# Altium PCB ESP12.PcbDoc
Units mm, origin at the board's own origin, x right, y up, seen from the top; angles counter-clockwise.
Board outline 50.31 x 70.27 mm, 2 copper layers (Top Layer, Bottom Layer); 32 components, 27 nets, 150 pads, 17 vias.
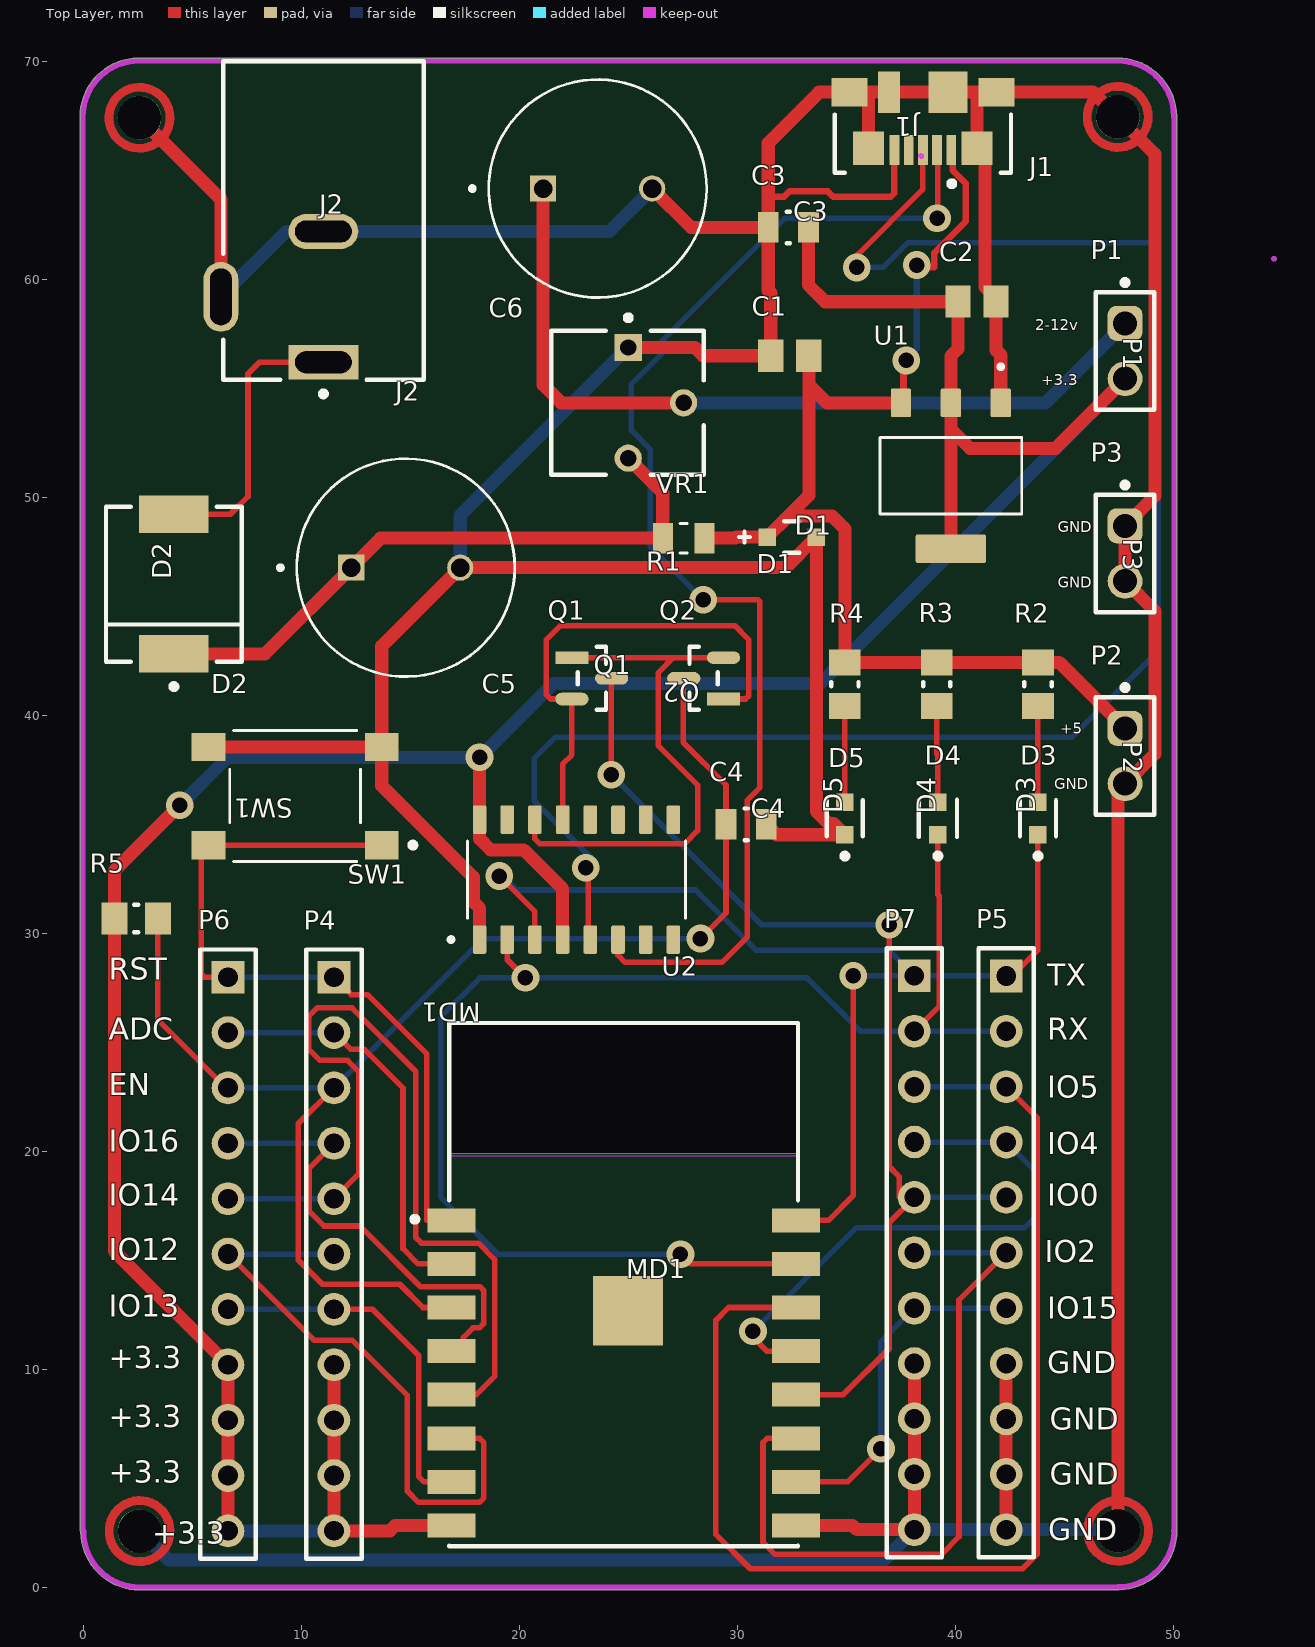
[diagram p0: Top Layer view]
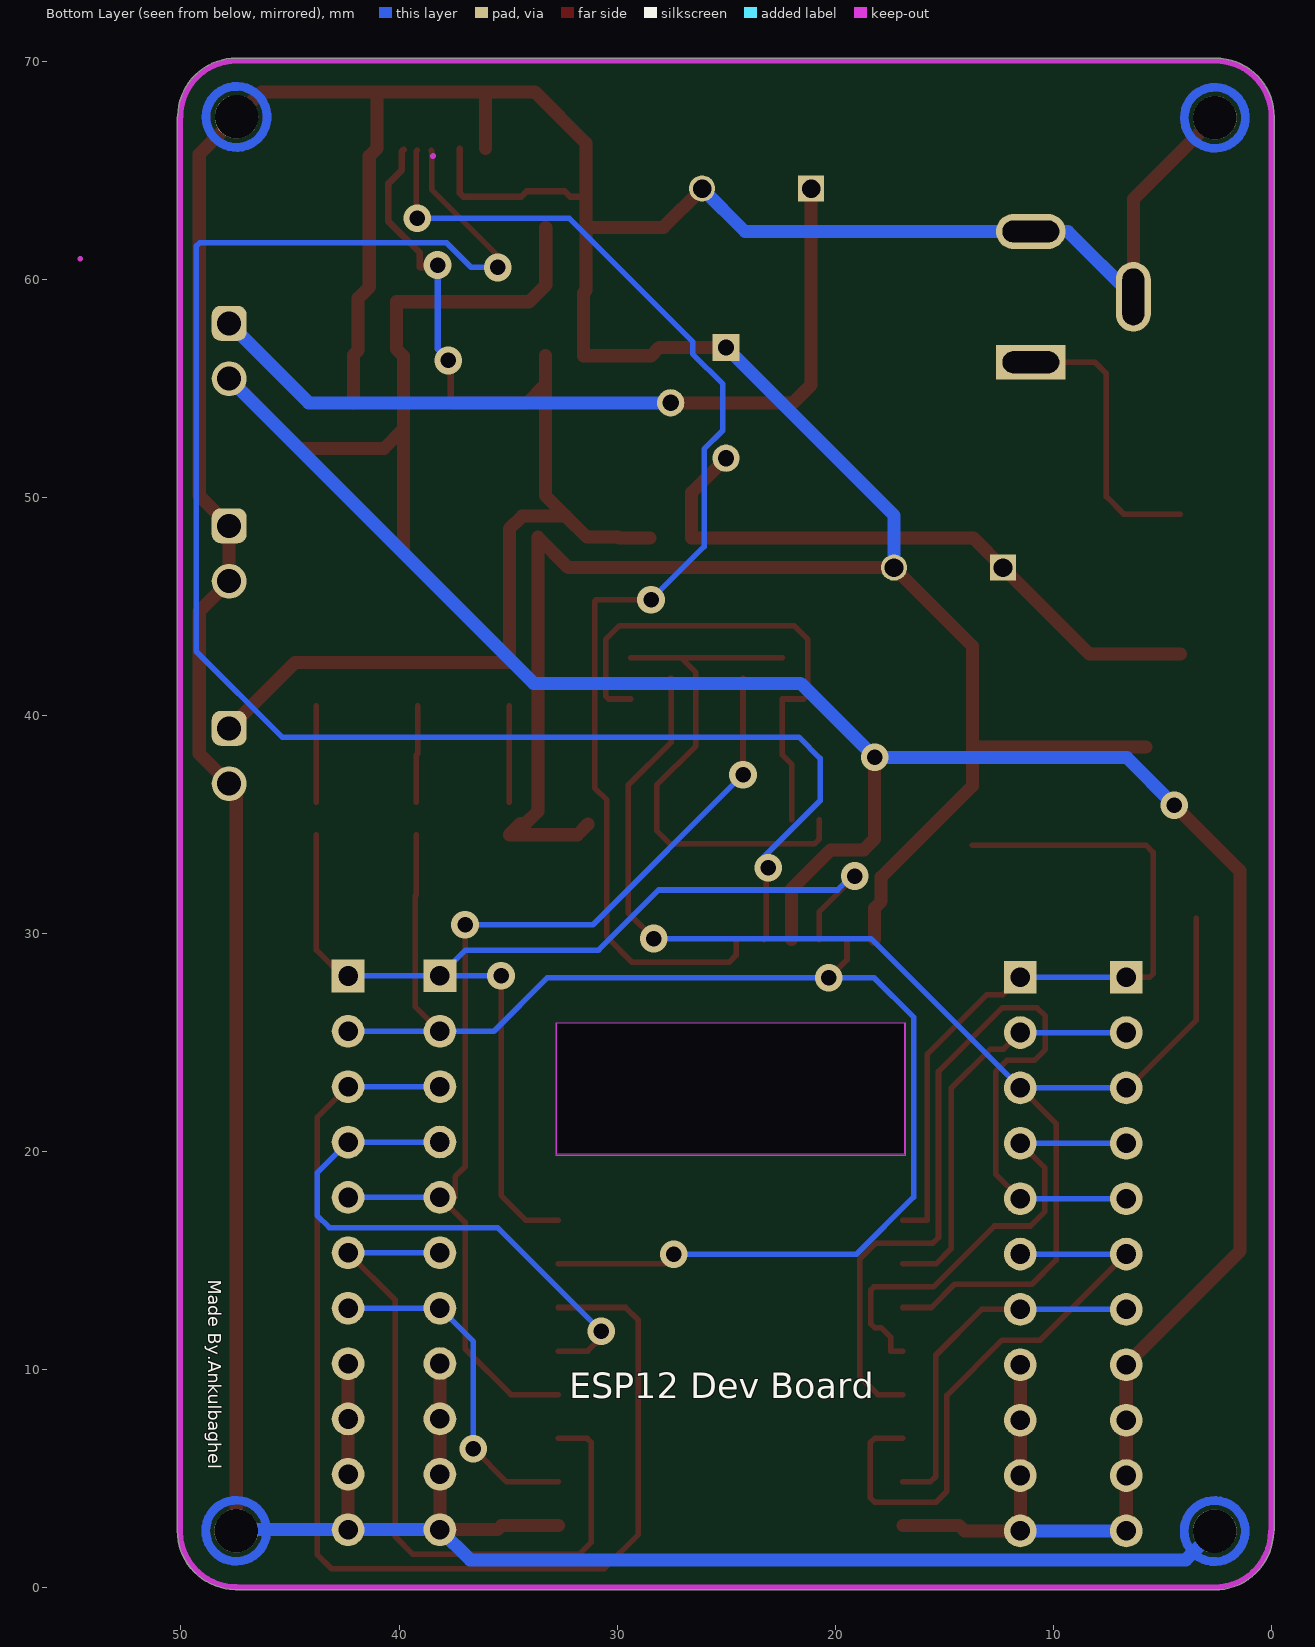
[diagram p1: Bottom Layer view, seen from below]
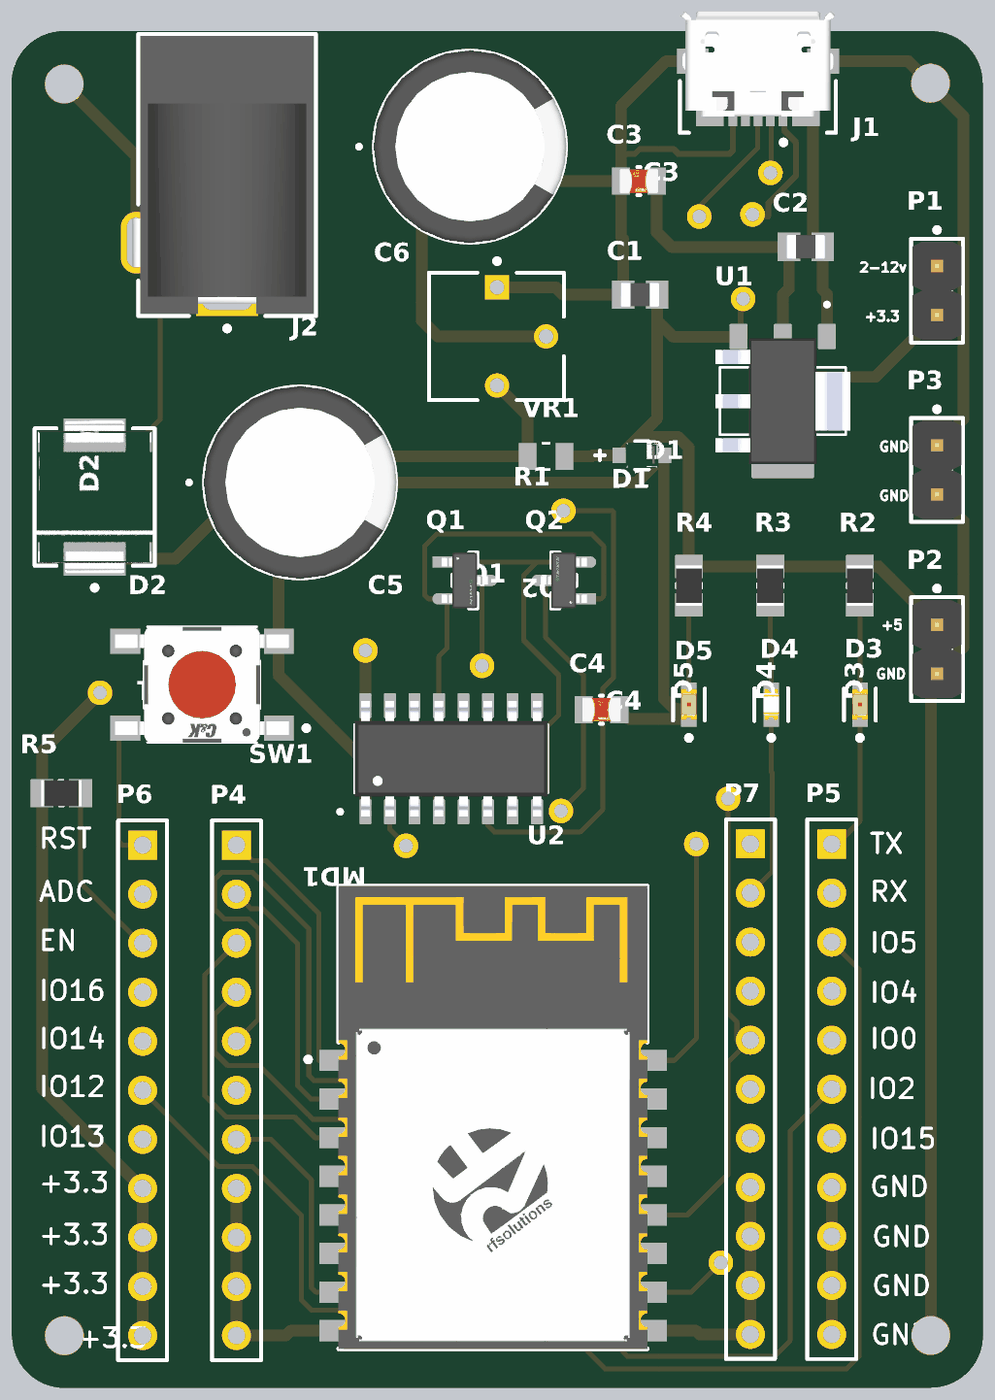
[diagram p2: 3D render of the assembled board from above, using the file's embedded part models]

## Layer stack, top to bottom
Top Solder: solder mask 0.0102, Solder Resist, Dk 3.5
Top Layer: signal copper 0.0356
Dielectric 1: dielectric 0.32, FR-4, Dk 4.8
Bottom Layer: signal copper 0.0356
Bottom Solder: solder mask 0.0102, Solder Resist, Dk 3.5

## Board outline
-0.144,2.603 -0.144,67.437 cw(c2.555,67.437) 2.534,70.136 2.557,70.138 47.452,70.138 cw(c47.452,67.439) 50.15,67.484 50.165,67.425 50.165,2.586 cw(c47.466,2.586) 47.511,-0.113 47.452,-0.127 2.587,-0.127 cw(c2.587,2.572)
cut-out: 16.794,19.872 16.794,25.866 32.778,25.866 32.778,19.872

## Design rules (kind name [scope] priority, off if disabled: settings)
Clearance [All] p1: gap=0.254 ignorepadtopadclearanceinfootprint=FALSE
PolygonConnect [All] p1: connectstyle=Relief reliefconductorwidth=0.254 reliefentries=4 polygonreliefangle="90 Angle" airgapwidth=0.254
RoutingVias [All] p1: holewidth=0.711 width=1.27 viastyle="Through Hole" minholewidth=0.711 minwidth=1.27 maxholewidth=0.711 maxwidth=1.27
SolderMaskExpansion [All] p1: expansion=0 istentingtop=FALSE
SupplyNets "Schematic Supply Nets_4" [InNet('+5')] p1: voltage=0.000
SupplyNets "Schematic Supply Nets_3" [InNet('2-12V')] p2: voltage=0.000
SupplyNets "Schematic Supply Nets_2" [InNet('GND')] p3: voltage=0.000
SupplyNets "Schematic Supply Nets_1" [InNet('+12V')] p4: voltage=0.000
SupplyNets "Schematic Supply Nets" [InNet('+3.3')] p5: voltage=0.000
Width [InNetClass('Power')] p1: maxlimit=0.9 minlimit=0.3 preferedwidth=0.6
30 further rules are at their usual default settings.

## Classes and differential pairs
net class Comm: D+ D- EN IO0 RST RX TX
net class Power: 2-12V +3.3 +5 +12V GND

## Components (designator, comment, footprint, x,y, rotation, side; value= is the part's Value field where it differs from the comment)
C1 "10uF" CAPC2012X145N 32.411,56.484 r0 top
C2 "10uF" CAPC2012X145N 40.997,58.968 r0 top
C3 "100nF" FP-CC0805-0_85-MFG 32.346,62.37 r0 top value="100 nF"
C4 "1uF" FP-CC0805-0_85-MFG 30.409,34.992 r0 top value="1 uF"
C5 "1000uF" CAPPRD500W60D1000H1600 14.796,46.764 r0 top
C6 "1000uF" CAPPRD500W60D1000H1600 23.598,64.152 r0 top
D1 "MM3Z5V6B" FP-MM3Z5V6B-MFG 32.508,48.168 r0 top
D2 "SS34-E3/57T" FP-95402-MFG 4.158,46.008 r90 top
D3 "LTST-C190KRKT" FP-LTST-C190KRKT-MFG 43.794,35.262 r90 top
D4 "LTST-C190KGKT" FP-LTST-C190KGKT-MFG 39.204,35.262 r90 top
D5 "LTST-C190KRKT" FP-LTST-C190KRKT-MFG 34.938,35.262 r90 top
J1 "473460001" FP-473460001-MFG 38.513,68.225 r180 top
J2 "PJ-102A" FP-PJ-102A-MFG 11.018,62.684 r0 top
MD1 "ESP-12S" FP-ESP-12S-MFG 24.786,13.878 r0 top
P1 "61300211121" 61300211121 47.79,56.7 r270 top
P2 "61300211121" 61300211121 47.79,38.124 r270 top
P3 "61300211121" 61300211121 47.79,47.412 r270 top
P4 "Header 11" HDR1X11 11.502,27.98 r270 top
P5 "Header 11" HDR1X11 42.336,28.036 r270 top
P6 "Header 11" HDR1X11 6.642,27.98 r270 top
P7 "Header 11" HDR1X11 38.124,28.038 r270 top
Q1 "BSS138" FP-318-08-IPC_B 23.328,41.688 r0 top
Q2 "BSS138" FP-318-08-IPC_B 28.458,41.688 r180 top
R1 "10k" RESC2012X60N 27.54,48.114 r0 top
R2 "1K" RESC2013X60X35ML10T20 43.794,41.418 r270 top
R3 "1K" RESC2013X60X35ML10T20 39.15,41.418 r270 top
R4 "1K" RESC2013X60X35ML10T20 34.938,41.418 r270 top
R5 "1K" RESC2013X60X35ML10T20 2.43,30.672 r0 top
SW1 "PTS645SM43SMTR92LFS" PTS645SM43SMTR92LFS_MFG 9.72,36.288 r180 top
U1 "AMS1117-3.3" SOT229P700X180-4N 39.798,50.976 r270 top
U2 "CH340C" SOIC127P600X180-16N 22.626,32.454 r90 top
VR1 "3362P-1-103LF" BOUR-3362P 24.965,54.324 r270 top

## Footprints (in the part's own frame and the unit in brackets; to place one, negate y for a bottom-side part, rotate by r counter-clockwise, add the part's x,y. Pads: shape width x height; smd on the part's side, far side on the other; paste and mask are expansions set on the pad)
61300211121 [mm] "Pin Header, pitch 2.54 mm, THT, Vertical, single row, 2p"
  rrect50% 1.6x1.6 hole 1.1: 1(-1.27,0)
  round 1.6 hole 1.1: 2(1.27,0)
  silkscreen extent -3.26,-1.35 2.69,1.34, body extent -2.54,-1.27 2.54,1.27, height 8.57
BOUR-3362P [mm] "THD, 3-Leads, Body 6.6x6.99mm, Pitch 2.54mm"
  rect 1.25x1.25 hole 0.75: 1(-2.54,0.035)
  round 1.25 hole 0.75: 2(0,2.575) 3(2.54,0.035)
  silkscreen extent -4.02,-3.49 3.3,3.5, body extent -3.3,-3.49 3.3,3.49, height 4.95
CAPC2012X145N [mm]
  rect 1.16x1.47 smd: 1(-0.875,0) 2(0.875,0)
  body extent -1,-0.63 1,0.63, height 0.7
CAPPRD500W60D1000H1600 [mm]
  round 1.2 hole 0.85: N(2.5,0)
  rect 1.2x1.2 hole 0.85: P(-2.5,0)
  silkscreen extent -5.85,-5 5,5, body extent -5,-5 5,5, height 16
FP-318-08-IPC_B [mm]
  rect 1.524x0.578 smd paste+0 mask+0: 1(-0.91,0.95)
  rrect100% 1.524x0.578 smd paste+0 mask+0: 2(-0.91,-0.95) 3(0.91,0)
  silkscreen extent -0.65,-1.45 0.65,1.45, body extent -1.92,-1.7 1.92,1.7, height 0.25
FP-95402-MFG [mm]
  rect 1.72x3.2 smd paste+0 mask+0: 1(-3.205,0) 2(3.205,0)
  silkscreen extent -4.82,-3.11 3.55,3.11, body extent -4.17,-3.21 4.17,3.21, height 0.25
FP-473460001-MFG [mm]
  rect 0.45x1.38 smd paste+0 mask+0: 1(-1.3,2.31) 2(-0.65,2.31) 3(0,2.31) 4(0.65,2.31) 5(1.3,2.31)
  rect 1.425x1.55 smd paste+0 mask+0: 6(-2.488,2.225) 7(2.487,2.225)
  rect 1.65x1.3 smd paste+0 mask+0: 8(-3.375,-0.35) 11(3.375,-0.35)
  rect 1.8x1.9 smd paste+0 mask+0: 9(-1.15,-0.35)
  rect 1x1.9 smd paste+0 mask+0: 10(1.55,-0.35)
  silkscreen extent -4.04,0.68 4.05,3.97, body extent -4.3,-2.48 4.3,3.45, height 0.25
FP-CC0805-0_85-MFG [mm]
  rect 0.95x1.4 smd paste+0 mask+0: 1(-0.925,0) 2(0.925,0)
  silkscreen extent -0.07,-0.72 0.07,0.72, body extent -1.6,-1.05 1.6,1.05, height 0.25
FP-ESP-12S-MFG [mm]
  rect 2.2x1.1 smd paste+0 mask+0: 1(-7.9,2.95) 2(-7.9,0.95) 3(-7.9,-1.05) 4(-7.9,-3.05) 5(-7.9,-5.05) 6(-7.9,-7.05) 7(-7.9,-9.05) 8(-7.9,-11.05) 9(7.9,-11.05) 10(7.9,-9.05) 11(7.9,-7.05) 12(7.9,-5.05) 13(7.9,-3.05) 14(7.9,-1.05) 15(7.9,0.95) 16(7.9,2.95)
  rect 3.2x3.2 smd paste+0 mask+0: 17(0.2,-1.2)
  Keep-Out Layer region: -8,5.9 8,5.9 8,12 -8,12
  Keep-Out Layer region: -8,5.9 8,5.9 8,12 -8,12
  silkscreen extent -9.7,-12 8,12, body extent -9.1,-12.1 9.1,12.1, height 0.25
FP-LTST-C190KGKT-MFG [mm]
  rect 0.8x0.8 smd paste+0 mask+0: 1(-0.75,0) 2(0.75,0)
  silkscreen extent -1.85,-0.87 0.85,0.87, body extent -1.25,-0.55 1.25,0.55, height 0.25
FP-LTST-C190KRKT-MFG [mm]
  rect 0.8x0.8 smd paste+0 mask+0: 1(-0.75,0) 2(0.75,0)
  silkscreen extent -1.85,-0.82 0.83,0.83, body extent -1.25,-0.55 1.25,0.55, height 0.25
FP-MM3Z5V6B-MFG [mm]
  rect 0.8x0.8 smd paste+0 mask+0: 1(-1.125,0) 2(1.125,0)
  silkscreen extent -2.42,-0.73 0.35,0.72, body extent -1.63,-0.82 1.63,0.82, height 0.25
FP-PJ-102A-MFG [mm]
  rect 3.2x1.6 hole 1 slot 2.6 at 0 deg paste-2539.97 mask+0: 1(0,-6.5)
  rrect100% 3.2x1.6 hole 1 slot 2.6 at 0 deg paste-2539.97 mask+0: 2(0,-0.5)
  rrect100% 1.6x3.2 hole 2.6 slot 1 at 0 deg paste-2539.97 mask+0: 3(-4.7,-3.5)
  silkscreen extent -4.6,-8.07 4.6,7.3, body extent -5.6,-7.4 4.7,7.4, height 0.25
HDR1X11 [mm] "Connector; Header; 11 Position"
  rect 1.5x1.5 hole 0.9: 1(0,0)
  round 1.5 hole 0.9: 2(2.54,0) 3(5.08,0) 4(7.62,0) 5(10.16,0) 6(12.7,0) 7(15.24,0) 8(17.78,0) 9(20.32,0) 10(22.86,0) 11(25.4,0)
  silkscreen extent -1.27,-1.27 26.67,1.27
PTS645SM43SMTR92LFS_MFG [mm] "Recommended Land Pattern"
  rect 1.55x1.3 smd paste+0 mask+0: 1(-3.975,2.25) 2(3.975,2.25) 3(-3.975,-2.25) 4(3.975,-2.25)
  silkscreen extent -5.53,-3 3,3, body extent -4.5,-3 4.5,3, height 5.3
RESC2012X60N [mm]
  rect 0.92x1.38 smd: 1(-0.955,0) 2(0.955,0)
  silkscreen extent -0.17,-0.68 0.17,0.68
RESC2013X60X35ML10T20 [mm] "Chip Resistor, 2-Leads, Body 2.1x1.35mm, IPC Low Density"
  rect 1.2x1.45 smd: 1(-1,0) 2(1,0)
  silkscreen extent -0.1,-0.63 0.1,0.62, body extent -1.05,-0.68 1.05,0.67, height 0.6
SOIC127P600X180-16N [mm]
  rrect25% 1.31x0.62 smd: 1(-2.75,4.445) 2(-2.75,3.175) 3(-2.75,1.905) 4(-2.75,0.635) 5(-2.75,-0.635) 6(-2.75,-1.905) 7(-2.75,-3.175) 8(-2.75,-4.445) 9(2.75,-4.445) 10(2.75,-3.175) 11(2.75,-1.905) 12(2.75,-0.635) 13(2.75,0.635) 14(2.75,1.905) 15(2.75,3.175) 16(2.75,4.445)
  silkscreen extent -2.85,-5 1.78,5.85, body extent -3,-5 3,5, height 1.8
SOT229P700X180-4N [mm]
  rrect15% 1.31x0.93 smd: 1(-3.345,2.29) 2(-3.345,0) 3(-3.345,-2.29)
  rrect15% 1.31x3.24 smd: 4(3.345,0)
  silkscreen extent -5.1,-3.25 1.75,3.25, body extent -3.25,-3.5 3.25,3.5, height 1.8

## Part data
C1 C2: library part CC0805KKX5R8BB106, "10 ÂµF Â±10% 25V Ceramic Capacitor X5R 0805 (2012 Metric)", Package="0805 Yageo", Check_prices=https://www.snapeda.com/parts/CC0805KKX5R8BB106/Yageo/view-part/?ref=eda, MF=Yageo, MP=CC0805KKX5R8BB106, SnapEDA_Link=https://www.snapeda.com/parts/CC0805KKX5R8BB106/Yageo/view-part/?ref=snap
C3: library part CMP-2100-03606-3, "CAP CER 0.1UF 50V X7R 0805", Capacitance="100 nF", Manufacturer=Yageo, Manufacturer Part Number=CC0805KRX7R9BB104, Package=CC0805-0.85, Temperature="-30°C to +85°C", Temperature Characteristic=X7R, Temperature Range High=+85°C, Temperature Range Low=-30°C, Tolerance=0.1, Voltage Rating="50 V", Automotive=No, Category=Cap, ComponentLink2Description=Datasheet, ComponentLink2URL=http://www.yageo.com/documents/recent/UPY-GPHC_Y5V_6.3V-to-50V_8.pdf, Device Class L1="Passive Components", Device Class L2=Capacitors, Device Class L3="Ceramic Capacitors", Digikey Description="CAP CER 0.1UF 50V X7R 0805", Footprint Url=http://www.yageo.com/exep/pages/download/literatures/UPY-C_GEN_24.pdf, Height=0.95mm, Ipc Land Pattern Name=CAPC200125X85, Lead Free=Yes, Material=Ceramic, Mouser Description="Multilayer Ceramic Capacitors MLCC - SMD/SMT 100nF 50V X7R 10%", Octopart=https://octopart.com/cc0805krx7r9bb104-yageo-192993, RoHS=TRUE
C4: library part CMP-03422-000001-1, "CAP CER 1UF 16V X7R 0805", Capacitance="1 uF", Manufacturer=Yageo, Manufacturer Part Number=CC0805KKX7R7BB105, Package=CC0805-0.85, Temperature="-30°C to +85°C", Temperature Characteristic=X7R, Temperature Range High=+85°C, Temperature Range Low=-30°C, Tolerance=0.1, Voltage Rating="16 V", Automotive=No, Category=Cap, ComponentLink2Description=Datasheet, ComponentLink2URL=http://www.yageo.com/documents/recent/UPY-GPHC_Y5V_6.3V-to-50V_8.pdf, Device Class L1="Passive Components", Device Class L2=Capacitors, Device Class L3="Ceramic Capacitors", Digikey Description="CAP CER 1UF 16V X7R 0805", Footprint Url=http://www.yageo.com/exep/pages/download/literatures/UPY-C_GEN_24.pdf, Height=0.95mm, Ipc Land Pattern Name=CAPC200125X85, Lead Free=Yes, Material=Ceramic, Mouser Description="Multilayer Ceramic Capacitors MLCC - SMD/SMT 1.0uF 16V X7R 10%", Octopart=https://octopart.com/cc0805kkx7r7bb105-yageo-8376555, RoHS=TRUE
C5 C6: library part EEUFR1C102B, "CAP ALUM 1000UF 20% 16V RADIAL", Package="RADIAL-2 Panasonic", Availability="In Stock", Check_prices=https://www.snapeda.com/parts/EEU-FR1C102B/Panasonic/view-part/2318035/?ref=eda, MF=Panasonic, MP=EEU-FR1C102B, Price=None, Purchase-URL=https://pricing.snapeda.com/search/part/EEU-FR1C102B/?ref=eda, SnapEDA_Link=https://www.snapeda.com/parts/EEU-FR1C102B/Panasonic/view-part/2318035/?ref=snap
D1: library part CMP-07164-000010-1, "DIODE ZENER 5.6V 200MW SOD323F", Forward Current=10mA, Manufacturer="ON Semiconductor", Max Junction Temp=+150°C, Max Reverse Leakage Current=0.9uA, Max Zener Voltage=5.71V, Nom Zener Voltage=5.6V, Package=SOD323F, Power Dissipation=200mW, Reverse Voltage=2V, Temperature="to +150°C", Automotive=No, Category=Diode, ComponentLink2Description=Datasheet, ComponentLink2URL=https://www.onsemi.com/pub/Collateral/MM3Z9V1B-D.pdf, Device Class L1="Discrete Semiconductors", Device Class L2=Diodes, Device Class L3="Zener Diodes", Digikey Description="DIODE ZENER 5.6V 200MW SOD323F", Height=1mm, Lead Free=Yes, Manufacturer Part Number=MM3Z5V6B, Mouser Description="Zener Diodes Diode Zener 5.6V 200mW 2%", Octopart=https://octopart.com/mm3z5v6b-on+semiconductor-84329898, RoHS=TRUE, Temperature Range High=+150°C, Zener Impedance=37Ω
D2: library part CMP-02539-000012-1, "DIODE SCHOTTKY 40V 3A DO214AB", Forward Current=3A, Manufacturer=Vishay, Max Junction Temp=+150°C, Max Repetitive Reverse Voltage=40V, Max Surge Forward Current=100A, Package=95402, Peak Reverse Current=0.5mA, Temperature="-55°C to +150°C", Temperature Range Low=-55°C, Automotive=No, Category=Diode, ComponentLink2Description=Datasheet, ComponentLink2URL=http://www.vishay.com/docs/88751/ss32.pdf, Device Class L1="Discrete Semiconductors", Device Class L2=Diodes, Device Class L3="Schottky Diodes", Digikey Description="DIODE SCHOTTKY 40V 3A DO214AB", Footprint Url=http://www.vishay.com/docs/95402/smc.pdf, Height=2.62mm, Lead Free=Yes, Manufacturer Part Number=SS34-E3/57T, Mouser Description="Schottky Diodes & Rectifiers 3.0 Amp 40 Volt", Octopart=https://octopart.com/ss34-e3%2F57t-vishay-39552907, RoHS=TRUE, Standoff Height=0mm, Temperature Range High=+150°C
D3 D5: library part CMP-1674-00011-2, "LED RED CLEAR CHIP SMD", Case Code (Imperial)=0603, Case Code (Metric)=1608, Color=Red, Forward Current=30mA, Forward Voltage=2.4V, Lens Color=Colorless, Max Operating Temperature=85°C, Min Operating Temperature=-55°C, Package Quantity=1, Power Dissipation=75mW, Reverse Voltage=5V, Test Current=20mA, Case/Package=0603, Depth=0.8mm, Dominant Wavelength=631nm, Height=0.8mm, Illumination Color=Red, Lead Free="Lead Free", Length=1.6mm, Lens Style=Diffused, Lens Transparency=Clear, Luminous Intensity=54mcd, Mount="Surface Mount", Number of Elements=1, Number of LEDs=1, Number of Pins=2, Packaging="Tape and Reel", Power Rating=75mW, Radiation Hardening=No, Viewing Angle=130°, Wavelength=639nm, Width=0.8mm
D4: library part CMP-2000-05197-2, "LED GREEN CLEAR CHIP SMD", Case Code (Imperial)=0603, Case Code (Metric)=1608, Color=Green, Forward Current=30mA, Forward Voltage=2V, Lens Color=Colorless, Max Operating Temperature=85°C, Min Operating Temperature=-55°C, Package Quantity=1, Power Dissipation=75mW, Reverse Voltage=5V, Test Current=20mA, Case/Package=0603, Depth=0.8mm, Dominant Wavelength=571nm, Height=0.8mm, Illumination Color=Green, Lead Free="Lead Free", Length=1.6mm, Lens Style=Diffused, Lens Transparency=Clear, Luminous Intensity=35mcd, Mount="Surface Mount", Number of Elements=1, Number of LEDs=1, Number of Pins=2, Packaging="Tape and Reel", Power Rating=75mW, Radiation Hardening=No, Viewing Angle=130°, Wavelength=574nm, Width=0.8mm
J1: library part CMP-2000-05246-2, "CONN RCPT USB2.0 MICRO B SMD R/A", Current Rating=1.8A, Manufacturer=Molex, Package=0, Temperature="-30°C to +85°C", Temperature Range High=+85°C, Temperature Range Low=-30°C, Voltage Rating=30V, Automotive=No, Category=Conn, ComponentLink2Description=Datasheet, ComponentLink2URL=https://www.molex.com/webdocs/datasheets/pdf/en-us/0473460001_IO_CONNECTORS.pdf, Conn Orientation="Right Angle", Contact Material=Gold,Nickel, Device Class L1=Connectors, Device Class L2="USB Connectors", Device Class L3=unset, Digikey Description="CONN RCPT USB2.0 MICRO B SMD R/A", Footprint Url=https://www.molex.com/pdm_docs/sd/473460001_sd.pdf, Height=2.945mm, Is Female=yes, Lead Free=Yes, Manufacturer Part Number=473460001, Number Of Contacts=5, Octopart=https://octopart.com/47346-0001-molex-7164928, Pitch=0.65mm, RoHS=TRUE, Shielding=true, Usb Standard="USB 2.0"
J2: library part CMP-12637-106234071-1, "PJ-102A 2.0 x 6.5 mm, 2.5 A, Horizontal, Through Hole, Tapered Pins, Dc Power Jack Connector", Color=Black, Current Rating=2.5A, Flammability Rating="UL94 V-0", Insulation Resistance=50MΩ, Max Operating Temperature=85°C, Min Operating Temperature=-25°C, Voltage Rating=24V, Contact Gender=Male, Contact Material="Copper, Nickel, Tin", Contact Plating=Nickel, Diameter=2.1mm, Gender=Male, Height=11.2mm, Housing Color=Black, Housing Material=Thermoplastic, Inside Diameter=2mm, Lead Free="Lead Free", Lifecycle Status=Production, Mount="Through Hole", NexarPartId=106234071, Number of Conductors=2, Number Of Contacts=3, Orientation=Horizontal, Outside Diameter=6.5mm, Packaging=Bulk, RoHS=Compliant, Schedule B="8536695050, 8536695050", Shielding=No, Termination="Through Hole", Voltage Rating (DC)=24V
MD1: library part CMP-204316-000002-1, "RX TXRX MOD WIFI PCB TRACE SMD", Frequency=2.484GHz, Data Rate=54Mbps, Interface=I2C, Sensitivity=-90dBm, Series=-
P1 P2 P3: library part CMP-1712-00002-7, "THT Vertical Pin Header WR-PHD, Pitch 2.54 mm, Single Row, 2 pins", Color=Black, Contact Resistance=20mΩ, Current Rating=3A, Max Operating Temperature=105°C, Min Operating Temperature=-40°C, Operating Supply Voltage=250V, Connector Type="Male Pin", Contact Gender=Male, Contact Material=Gold, Contact Mating Length=5.9944mm, Contact Plating=Gold, Gender=Male, Height=8.94mm, Housing Material=PBT, Lead Free="Lead Free", Lead Pitch=2.54mm, Mount="Through Hole", Number Of Contacts=2, Number of Pins=2, Number of Positions=2, Number of Rows=1, Orientation=Vertical, Packaging=Bulk, Pitch=2.54mm, REACH SVHC=No, RoHS=Compliant, Termination="Through Hole", Voltage Rating=250V
P4 P5 P6 P7: "Header, 11-Pin", LatestRevisionDate=17-Jul-2002, LatestRevisionNote="Re-released for DXP Platform.", Publisher="Altium Limited"
Q1 Q2: library part CMP-07173-000101-1, "MOSFET N-CH 50V 220MA SOT-23", Case/Package=SOT-23, Continuous Drain Current (ID)=220mA, Drain to Source Breakdown Voltage=50V, Drain to Source Resistance=3.5R, Gate to Source Voltage (Vgs)=20V, Input Capacitance=27pF, Max Operating Temperature=150°C, Max Power Dissipation=360mW, Min Operating Temperature=-55°C, On-State Resistance=6R, Package Quantity=1, Threshold Voltage=1.3V, Contact Plating=Tin, Current Rating=220mA, Drain to Source Voltage (Vdss)=50V, Dual Supply Voltage=50V, Element Configuration=Single, Fall Time=9ns, Height=0.93mm, Lead Free="Lead Free", Length=2.92mm, Mount="Surface Mount", Nominal Vgs=1.3V, Number of Elements=1, Number of Pins=3, Packaging="Tape and Reel", Power Dissipation=360mW, Radiation Hardening=No, Rds On Max=3.5R, REACH SVHC="No SVHC", Rise Time=9ns, Termination=SMD/SMT, Turn-Off Delay Time=20ns, Turn-On Delay Time=2.5ns, Voltage Rating (DC)=50V, Weight=0.03g, Width=1.3mm
R1: library part RC0805JR-0710KL, "RESISTOR THICK FILM 5% 0.125W", Package=None, Availability=Unavailable, MF="{'manufacturer': u'YAGEO'}", MP=RC0805JR-0710KL, Price=None
R2 R3 R4 R5: library part CMP-2100-03671-1, "Chip Resistor, 1 KOhm, +/- 1%, 125 mW, -55 to 155 degC, 0805 (2012 Metric), RoHS, Tape and Reel", Case Code (Imperial)=0805, Case Code (Metric)=2012, Manufacturer=Yageo, Max Operating Temperature=155degC, Max Power Dissipation=125mW, Min Operating Temperature=-55degC, Package Description="2-Pin Surface Mounted Device, Body 2 x 1.25 mm", Package Quantity=1, Resistance=1KOhm, Temperature Coefficient=100ppm/degreesC, Tolerance=1%, Voltage Rating=150V, Case/Package=0805, Composition=ThickFilm, Datasheet URL=http://www.yageo.com/NewPortal/yageodocoutput?fileName=/pdf/R-Chip/PYu-RC_Group_51_RoHS_L_5.pdf, Datasheet Version="Rev. 5, 10/2016", Depth=1.25mm, Height=0.024inch, Lead Free=LeadFree, Length=0.079inch, Manufacturer URL=http://www.yageo.com/, Military Standard=Not, Number of Pins=2, Number of Terminations=2, Package Reference=0805, Packaging=TapeandReel, Power Rating=125mW, REACH SVHC=Unknown, RoHSCompliant=true, Termination=SMD/SMT, Voltage Rating (DC)=150V, Width=0.049inch
SW1: library part CMP-2000-05160-3, "Switch Tactile N.O SPST Round Button Gull Wing 0.05A 12VDC 100000Cycle 1.57N SMD T/R", Case/Package=SMD/SMT, Color=Black, Contact Current Rating=50mA, Contact Resistance=100mΩ, Insulation Resistance=100GΩ, Max Operating Temperature=60°C, Max Voltage Rating (DC)=12V, Min Operating Temperature=-20°C, Operating Force=1.57N, Actuator Length=850µm, Actuator Material="Nylon, Polyamide", China RoHS=Compliant, ComponentLink1Description="Manufacturer's Website", ComponentLink1URL=http://www.ck-components.com/, ComponentLink2Description="Datasheet URL", ComponentLink2URL=https://www.ckswitches.com/media/1471/pts645.pdf, Contact Material=Silver, Contact Plating=Silver, Current Rating=50mA, Depth=9mm, Electrical Life=100kcycles, Height=3.45mm, HelpURL=https://www.ckswitches.com/media/1471/pts645.pdf, Illumination Type="Illuminated, Non-Illuminated", Lead Free="Lead Free", Length=6mm, Life (Cycles)=100kcycles, Lifecycle Status=Production, Manufacturer Package Identifier=PTS645SM43SMTR92LFS, Max Current Rating=50mA, Mechanical Life=100kcycles, Mount="Surface Mount", Number of Positions=1, Orientation=Straight, Packaging="Cut Tape (CT)", REACH SVHC=Yes, RoHS=Compliant, Switch Function=Off-Mom, Termination=Solder, Throw Configuration=SPST, Voltage Rating (DC)=12V
U1: "Sot223/Pkg 1-Amp 3.3-Volt Low Drop Out Voltage Regulatator", Package="SOT-223 Seeed Technology", Check_prices=https://www.snapeda.com/parts/AMS1117-3.3/Advanced+Monolithic+Systems/view-part/?ref=eda, MF="Advanced Monolithic Systems", MP=AMS1117-3.3, SnapEDA_Link=https://www.snapeda.com/parts/AMS1117-3.3/Advanced+Monolithic+Systems/view-part/?ref=snap
U2: "USB to serial chip CH340", Package=None, Availability="Not in stock", Check_prices=https://www.snapeda.com/parts/CH340C/WCH/view-part/?ref=eda, MF=WCH, MP=CH340C, Price=None, SnapEDA_Link=https://www.snapeda.com/parts/CH340C/WCH/view-part/?ref=snap
VR1: library part CMP-1747-00004-1, "Square Trimpot(R) Trimming Potentiometer, 10 KOhm, 300 V, -55 to 125 degC, 3-Pin THD, RoHS, Tube", Case Code (Imperial)=0612, Case Code (Metric)=1632, Case/Package=1206, Max Operating Temperature=125degC, Min Operating Temperature=-25degC, Package Quantity=5000, Power Rating="1 W", Resistance="50 mohm", Tolerance=1%, Voltage Rating="220 mV", ComponentLink1Description="Manufacturer URL", ComponentLink1URL=http://www.bourns.com/, ComponentLink2Description=Datasheet, ComponentLink2URL=http://www.bourns.com/docs/Product-Datasheets/3362.pdf, DatasheetVersion=May-16, Height="0.6 mm", Length="3.2 mm", Mount="Surface Mount", PackageDescription="3-Pin Through Hole Device, Body 6.6 x 6.99 mm, Pitch 2.54 mm", PackageReference=3326P, Packaging="Tape and Reel", Pins=2, REACH SVHC="No SVHC", RoHSCompliant=True, Width="1.6 mm"

## Free pads (board coordinates)
  round 2 hole 2: 25(2.58,67.398) 25(2.587,2.572) 25(47.452,67.439) 25(47.466,2.586)

## Via types
v1: diameter 1.27, hole 0.711, Top Layer to Bottom Layer, 17 vias

## Nets (pads, with @x,y where several pads share a name; then routed paths per layer and width w, separated by ;. In a path a pad name is that pad's centre, name@x,y a point inside that pad or via, vN(x,y) a via of type N, cw(c..) or ccw(c..) an arc to the next point about the centre after c; other vN are vias at no path point)
2-12V: C6.P P1.1 VR1.2 | length 37.5
  Top Layer w0.6: C6.P 21.098,55.15 21.924,54.324 VR1.2
  Bottom Layer w0.6: VR1.2 44.144,54.324 P1.1
+3.3: C2.1 C3.2 MD1.8 P1.2 P4.8 P4.9 P4.10 P4.11 P6.8 P6.9 P6.10 P6.11 R5.1 U1.2 U1.4 U2.4 U2.16 | length 147.9
  Top Layer w0.6: v1(4.435,35.871) 1.43,32.866 R5.1 1.43,15.412 P6.8 P6.9 P6.10 P6.11 ; P4.8 P4.9 P4.10 P4.11 14.061,2.58 14.309,2.828 MD1.8 ; v1(18.181,38.06) U2.16 18.181,34.322 18.684,33.819 20.203,33.819 21.991,32.031 U2.4 ; C3.2 33.271,59.722 34.033,58.96 C2.1@40.122,58.96 ; U1.4 39.798,53.118 ; C2.1 C2.1@40.122,58.96 ; P1.2 44.589,52.229 40.687,52.229 39.798,53.118 ; 39.798,53.118 U1.2 39.798,56.47 40.122,56.794 C2.1@40.122,58.96
  Bottom Layer w0.6: v1(4.435,35.871) 6.619,38.055 18.176,38.055 v1(18.181,38.06) 21.58,41.459 33.819,41.459 P1.2 ; P6.11 P4.11
+5: C1.2 D1.1 J1.1 P2.1 R1.2 R2.1 R3.1 R4.1 U1.3 | length 53.4
  Top Layer w0.3: U1.3@37.508,54.311 37.627,54.43 37.627,56.149 v1(37.746,56.268) ; v1(38.232,60.642) 38.351,60.523 38.599,60.523 38.61,60.534 39.042,60.534 39.042,61.204 40.484,62.646 40.484,64.384 39.884,64.984 39.884,65.842 J1.1@39.812,65.915 ; J1.1@39.792,65.934 J1.1@39.812,65.915 ; J1.1 J1.1@39.812,65.915
  Top Layer w0.6: R1.2 29.911,48.114 29.965,48.168 D1.1 32.345,49.13 ; C1.2 33.286,55.15 ; U1.3@37.508,54.311 34.124,54.311 33.286,55.15 ; P2.1 44.766,42.418 R2.1 R3.1 R4.1 34.938,48.546 34.354,49.13 32.345,49.13 ; 32.345,49.13 33.286,50.071 33.286,55.15
  Bottom Layer w0.3: v1(37.746,56.268) 37.8,56.322 37.8,56.376 38.232,56.808 v1(38.232,60.642)
+12V: C5.P D2.1 R1.1 VR1.3 | length 29
  Top Layer w0.6: D2.1 8.335,42.803 C5.P 13.646,48.114 R1.1 26.585,50.199 VR1.3
ADC: MD1.2 P4.2 P6.2 | length 19
  Top Layer w0.254: P4.2 12.264,24.678 12.879,24.678 14.669,22.888 14.669,15.526 15.366,14.828 MD1.2
  Bottom Layer w0.254: P6.2 P4.2
D+: J1.3 U2.5 | length 79.8
  Top Layer w0.254: v1(23.058,32.994) 23.159,32.893 23.159,29.805 U2.5 ; v1(35.478,60.534) 35.532,60.588 35.532,61.134 38.502,64.104 38.502,65.88 38.513,65.891 J1.3
  Bottom Layer w0.254: v1(23.058,32.994) 23.058,33.264 23.274,33.48 20.682,36.072 20.682,38.016 21.654,38.988 45.36,38.988 49.302,42.93 49.302,61.506 49.15,61.658 37.811,61.658 36.687,60.534 v1(35.478,60.534)
D-: J1.2 U2.6 | length 57.4
  Top Layer w0.254: U2.6 24.531,28.988 24.861,28.657 29.301,28.657 30.47,29.826 30.47,36.1 31.028,36.658 31.028,45.218 30.952,45.294 v1(28.438,45.294) ; v1(39.163,62.795) 39.207,62.839 39.207,65.871 J1.2
  Bottom Layer w0.254: v1(28.438,45.294) 26.006,47.726 26.006,52.201 25.142,53.065 25.142,55.182 26.533,56.573 26.533,57.131 32.197,62.795 v1(39.163,62.795)
EN: C4.1 MD1.3 P4.3 P6.3 Q2.3 R5.2 | length 63.4
  Top Layer w0.254: R5.2 3.43,26.011 6.541,22.9 P6.3 ; P4.3 9.863,21.261 9.863,14.999 10.968,13.894 14.519,13.894 15.585,12.828 MD1.3 ; Q2.3 27.523,41.688 27.523,38.746 29.484,36.785 C4.1 29.484,30.923 v1(28.311,29.75)
  Bottom Layer w0.254: P6.3 P4.3 18.352,29.75 v1(28.311,29.75)
GND: C1.1 C2.2 C3.1 C4.2 C5.N C6.N D1.2 D5.1 J1.5 J1.6 J1.7 J1.8 J1.9 J1.10 J1.11 J2.2 J2.3 MD1.9 P2.2 P3.1 P3.2 P5.8 P5.9 P5.10 P5.11 P7.8 P7.9 P7.10 P7.11 pad.25 SW1.3 SW1.4 U1.1 U2.1 VR1.1 | length 378.4
  Top Layer w0.3: 31.421,63.828 31.475,63.774 32.145,63.774 32.399,64.028 34.143,64.028 34.397,63.774 37.044,63.774 37.206,63.936 37.206,65.988 37.214,65.98 J1.5
  Top Layer w0.4: 3.98,67.398 ccw(c2.58,67.398) 3.98,67.398 ; 3.987,2.572 ccw(c2.587,2.572) 3.987,2.572 ; 48.852,67.439 ccw(c47.452,67.439) 48.852,67.439 ; 48.866,2.586 ccw(c47.466,2.586) 48.866,2.586
  Top Layer w0.6: pad.25@2.58,67.398 6.318,63.66 J2.3 ; SW1.4 SW1.3 ; U2.1 18.181,31.15 17.89,31.441 17.89,32.565 13.695,36.76 SW1.3 ; VR1.1 28.057,56.864 28.437,56.484 C1.1 31.536,59.366 31.421,59.481 C3.1 ; C6.N 27.88,62.37 C3.1 ; C4.2 31.814,34.512 D5.1 34.417,35.033 34.178,35.033 33.633,35.578 D1.2 32.229,46.764 C5.N 13.695,43.163 SW1.3 ; MD1.9 35.296,2.828 35.486,2.638 P7.11 P7.10 P7.9 P7.8 ; J1.7 36.026,68.575 ; U1.1 42.088,56.521 41.872,56.737 41.872,59.123 41.364,59.631 41.364,65.637 J1.6 41.001,68.575 ; P5.11 P5.9 P5.8 ; pad.25@47.466,2.586 47.466,36.53 P2.2 49.164,38.228 49.164,44.768 P3.2 P3.1 49.164,50.056 49.164,65.727 46.316,68.575 J1.8 41.001,68.575 ; C3.1 31.421,63.828 31.421,66.236 33.76,68.575 J1.11 36.026,68.575 ; 36.026,68.575 J1.10 J1.9 41.001,68.575
  Bottom Layer w0.4: 3.98,67.398 ccw(c2.58,67.398) 3.98,67.398 ; 3.987,2.572 ccw(c2.587,2.572) 3.987,2.572 ; 48.852,67.439 ccw(c47.452,67.439) 48.852,67.439 ; 48.866,2.586 ccw(c47.466,2.586) 48.866,2.586
  Bottom Layer w0.6: pad.25@2.587,2.572 3.907,1.251 36.737,1.251 P7.11 ; J2.3 9.318,62.184 J2.2 24.13,62.184 C6.N ; C5.N 17.296,49.16 VR1.1 ; P7.11@38.126,2.636 47.416,2.636 pad.25@47.466,2.586
IO0: MD1.12 P5.5 P7.5 Q1.3 | length 50.2
  Top Layer w0.254: v1(24.221,37.268) 24.221,41.688 Q1.3 ; MD1.12 34.864,8.828 36.972,10.936 36.972,16.726 P7.5 37.429,17.878 37.429,18.828 36.972,19.285 v1(36.972,30.385)
  Bottom Layer w0.254: v1(24.221,37.268) 31.105,30.385 v1(36.972,30.385) ; P7.5 40.35,17.878 40.352,17.876 P5.5
IO2: MD1.11 P5.6 P7.6 | length 33.8
  Top Layer w0.254: MD1.11 31.373,6.828 31.181,6.636 31.181,2.064 31.74,1.505 39.36,1.505 40.172,2.318 40.172,13.172 P5.6
  Bottom Layer w0.254: P7.6 40.35,15.338 40.352,15.336 P5.6
IO4: MD1.13 P5.4 P7.4 | length 25.9
  Top Layer w0.254: v1(30.719,11.737) 30.719,11.462 31.353,10.828 MD1.13
  Bottom Layer w0.254: v1(30.719,11.737) 35.473,16.491 43.195,16.491 43.754,17.05 43.754,18.998 P5.4 P7.4@38.126,20.416
IO5: MD1.14 P5.3 P7.3 | length 55.6
  Top Layer w0.254: MD1.14 29.606,12.828 29.022,12.244 29.022,2.419 30.597,0.844 43.093,0.844 43.754,1.505 43.754,21.538 P5.3
  Bottom Layer w0.254: P7.3 40.35,22.958 40.352,22.956 P5.3
IO12: MD1.6 P4.6 P6.6 | length 28.1
  Top Layer w0.254: P6.6 10.587,11.335 12.334,11.335 14.874,8.795 14.874,4.4 15.382,3.892 18.176,3.892 18.379,4.096 18.379,6.636 18.187,6.828 MD1.6
  Bottom Layer w0.254: P6.6 P4.6
IO13: MD1.7 P4.7 P6.7 | length 16.8
  Top Layer w0.254: P4.7 13.281,12.74 15.382,10.639 15.382,5.082 15.636,4.828 MD1.7
  Bottom Layer w0.254: P6.7 P4.7
IO14: MD1.5 P4.5 P6.5 | length 41
  Top Layer w0.254: P4.5 12.633,18.951 12.633,23.654 12.125,24.162 10.861,24.162 10.353,24.67 10.353,26.194 10.734,26.575 12.334,26.575 15.255,23.654 15.255,16.034 15.509,15.78 18.125,15.78 18.875,15.03 18.875,9.671 18.032,8.828 MD1.5
  Bottom Layer w0.254: P6.5 P4.5
IO15: MD1.10 P5.7 P7.7 | length 15.8
  Top Layer w0.254: MD1.10 35.067,4.828 v1(36.591,6.352)
  Bottom Layer w0.254: v1(36.591,6.352) 36.591,11.265 P7.7 40.35,12.798 40.352,12.796 P5.7
IO16: MD1.4 P4.4 P6.4 | length 21.9
  Top Layer w0.254: P4.4 10.371,19.229 10.371,17.235 11.039,16.567 12.69,16.567 15.484,13.773 18.215,13.773 18.367,13.621 18.367,12.088 18.176,11.897 17.875,11.897 17.439,11.462 17.439,10.828 MD1.4
  Bottom Layer w0.254: P6.4 P4.4
NetD2_2: D2.2 J2.1 | length 13
  Top Layer w0.254: D2.2 6.746,49.213 7.559,50.026 7.559,55.658 8.085,56.184 J2.1
NetD3_2: D3.2 R2.2 | length 4.4
  Top Layer w0.254: D3.2 R2.2
NetD4_2: D4.2 R3.2 | length 4.4
  Top Layer w0.254: R3.2 39.15,38.236 39.204,38.182 D4.2
NetD5_2: D5.2 R4.2 | length 4.4
  Top Layer w0.254: D5.2 R4.2
NetQ1_1: Q1.1 Q2.2 U2.14 | length 24.6
  Top Layer w0.254: U2.14 20.721,34.322 20.95,34.093 27.574,34.093 28.184,34.703 28.184,36.785 26.38,38.589 26.38,41.952 27.066,42.638 ; Q1.1 27.066,42.638 ; Q2.2 27.066,42.638
NetQ1_2: Q1.2 Q2.1 U2.13 | length 23.1
  Top Layer w0.254: U2.13 21.991,37.751 22.418,38.177 Q1.2 21.437,40.738 21.249,40.926 21.249,43.466 21.884,44.101 29.885,44.101 30.52,43.466 30.52,40.875 30.384,40.738 Q2.1
RST: MD1.1 P4.1 P6.1 SW1.1 SW1.2 | length 34.6
  Top Layer w0.254: P6.1 5.563,27.98 5.414,28.129 5.414,33.707 SW1.2 SW1.1 ; P4.1 12.304,27.178 13.04,27.178 15.763,24.455 15.763,16.828 MD1.1
  Bottom Layer w0.254: P6.1 P4.1
RX: D4.1 MD1.15 P5.2 P7.2 U2.2 | length 65.1
  Top Layer w0.254: U2.2 19.451,28.779 v1(20.284,27.946) ; v1(27.396,15.272) 27.84,14.828 MD1.15 ; P7.2 39.258,26.632 39.258,31.705 39.204,31.759 D4.1
  Bottom Layer w0.254: v1(27.396,15.272) 19.014,15.272 16.398,17.888 16.398,26.143 18.201,27.946 v1(20.284,27.946) 33.203,27.946 35.651,25.498 P7.2 40.35,25.498 40.352,25.496 P5.2
TX: D3.1 MD1.16 P5.1 P7.1 U2.3 | length 51.9
  Top Layer w0.254: v1(19.09,32.62) 20.721,30.989 U2.3 ; MD1.16 34.178,16.828 35.321,17.971 v1(35.321,28.038) ; P5.1@42.471,27.901 43.794,29.224 D3.1
  Bottom Layer w0.254: v1(19.09,32.62) 19.244,32.62 19.885,31.978 28.089,31.978 30.851,29.216 36.946,29.216 P7.1 ; v1(35.321,28.038) P7.1 ; P5.1 40.352,28.036 40.35,28.038 P7.1
pads on no net: J1.4 MD1.17 U2.7 U2.8 U2.9 U2.10 U2.11 U2.12 U2.15

## Keep-outs
Keep-Out Layer:
  lines w0.254: -0.017,2.603 -0.017,67.437 cw(c2.555,67.437) 2.555,70.009 2.557,70.01 47.452,70.01 cw(c47.452,67.439) 50.023,67.439 50.038,67.425 50.038,2.587 ; 0.015,2.572 ccw(c2.587,2.572) 2.587,0 ; 2.646,0 47.452,0 47.466,0.014 ccw(c47.466,2.586) 50.038,2.587 ; 38.43,65.647 38.444,65.632 ; 50.028,2.596 50.038,2.587 ; 54.616,60.942 54.63,60.928

## Silkscreen, mask and mechanical layers (free items; w line width, h text height)
Top Overlay:
  text "2-12v" at 43.678,57.664 h0.5
  text "+3.3" at 43.948,55.126 h0.5
  text "GND" at 44.704,48.376 h0.5
  text "GND" at 44.704,45.838 h0.5
  text "+5" at 44.812,39.142 h0.5
  text "GND" at 44.542,36.604 h0.5
  text "RST" at 1.18,27.856 h1
  text "TX" at 44.218,27.586 h1
  text "ADC" at 1.18,25.102 h1
  text "RX" at 44.218,25.102 h1
  text "EN" at 1.18,22.564 h1
  text "IO5" at 44.218,22.456 h1
  text "IO16" at 1.18,19.972 h1
  text "IO4" at 44.218,19.864 h1
  text "IO14" at 1.18,17.488 h1
  text "IO0" at 44.218,17.488 h1
  text "IO12" at 1.18,15.004 h1
  text "IO2" at 44.11,14.896 h1
  text "IO13" at 1.18,12.412 h1
  text "IO15" at 44.218,12.304 h1
  text "+3.3" at 1.18,10.036 h1
  text "GND" at 44.218,9.82 h1
  text "+3.3" at 1.18,7.336 h1
  text "GND" at 44.326,7.228 h1
  text "+3.3" at 1.18,4.798 h1
  text "GND" at 44.326,4.69 h1
  text "GND" at 44.272,2.152 h1
  text "+3.3" at 3.178,1.99 h1
Bottom Overlay:
  text "Made By.Ankulbaghel" at 48.953,14.094 h1 r90
  text "ESP12 Dev Board" at 32.184,8.286 h2